# EAGLE board STorM32 NT imu v10-mpu9250 (EAGLE 6.5.0)
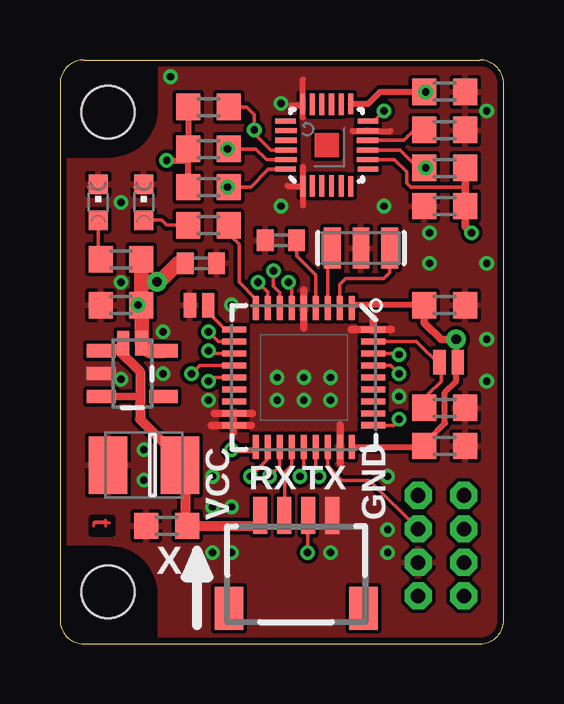
[diagram p0: board, top side]
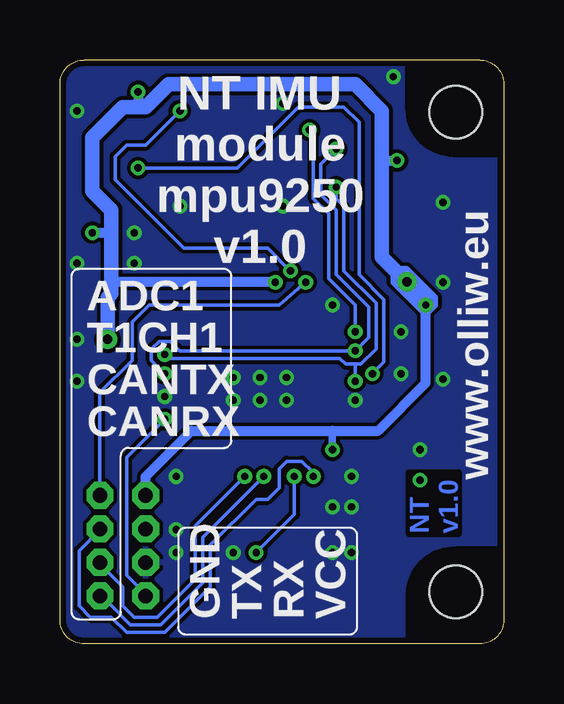
[diagram p1: board, bottom side, seen from below]

Size 18.49 x 24.35 mm. Coordinates in mm from the lower left corner, seen from the top.
Outline: 1,24.35 17.49,24.35 arc-90 18.49,23.35 18.49,1 arc-90 17.49,0 1,0 arc-90 0,1 0,23.35 arc-90 1,24.35
Copper layers (1*16): Top 0.035mm / dielectric 1.5mm / Bottom 0.035mm
Design rules "Fusion_eagle_rule_v1.1-shapes-supply-changed": minimum track width 6mil, minimum drill 12mil, track to track 6mil, track to pad 6mil, pad to pad 6mil, via to via 6mil, smd to smd 0mil, copper to edge 10mil, drill to drill 10mil, minimum pad ring 10mil, minimum via ring 6mil, stop-mask expansion 2mil, vias tented up to drill 100mil, thermal gap 6mil
Holes 2.2 mm at 2,2.17 2,22.18

## Footprints (pad centres in the part's own frame; a part is rotated, then mirrored left to right if it is on the bottom)
SMC_B = smd 1.6 x 2.4: + -1.5,0; - 1.5,0
C0603 = smd 1 x 1.1: 1 -0.85,0; 2 0.85,0
C0402 = smd 0.7 x 0.9: 1 -0.65,0; 2 0.65,0
QFN-24-3X3 = smd 0.85 x 0.21: 1 -1.725,1; 6 -1.725,-1; 13 1.725,-1; 18 1.725,1 | smd 0.9 x 0.21: 2 -1.7,0.6; 3 -1.7,0.2; 5 -1.7,-0.6; 14 1.7,-0.6; 15 1.7,-0.2; 16 1.7,0.2; 17 1.7,0.6 | smd 0.9 x 0.2: 4 -1.7,-0.2 | smd 0.21 x 0.85: 7 -1,-1.725; 12 1,-1.725; 19 1,1.725; 24 -1,1.725 | smd 0.21 x 0.9: 8 -0.6,-1.7; 9 -0.2,-1.7; 10 0.2,-1.7; 11 0.6,-1.7; 20 0.6,1.7; 21 0.2,1.7; 22 -0.2,1.7; 23 -0.6,1.7
SOT23-5 = smd 0.55 x 1.2: 1 -0.95,-1.3; 2 0,-1.3; 3 0.95,-1.3; 4 0.95,1.3; 5 -0.95,1.3
4X1_1P27_OCT_BILEX = drill 0.61 pad 1.118 octagon: 1 0,0; 2 0,-1.397; 3 0,-2.794; 4 0,-4.191
CHIPLED_0603 = smd 0.8 x 0.8: A 0,-0.75; C 0,0.75
SM04B-SRSS-TB = smd 0.6 x 1.55: 1 -1.5,2.975; 2 -0.5,2.975; 3 0.5,2.975; 4 1.5,2.975 | smd 1.2 x 1.8: FIT@1 -2.8,-0.9; FIT@2 2.8,-0.9
R0603 = smd 1 x 1.1: 1 -0.85,0; 2 0.85,0
SJ_2S-NO = smd 0.508 x 1.016: 1 -0.381,0; 2 0.381,0
VFQFPN36 = smd 1 x 0.25: 1 -2.9,2; 2 -2.9,1.5; 3 -2.9,1; 4 -2.9,0.5; 5 -2.9,0; 6 -2.9,-0.5; 7 -2.9,-1; 8 -2.9,-1.5; 9 -2.9,-2; 19 2.9,-2; 20 2.9,-1.5; 21 2.9,-1; 22 2.9,-0.5; 23 2.9,0; 24 2.9,0.5; 25 2.9,1; 26 2.9,1.5; 27 2.9,2 | smd 0.25 x 1: 10 -2,-2.9; 11 -1.5,-2.9; 12 -1,-2.9; 13 -0.5,-2.9; 14 0,-2.9; 15 0.5,-2.9; 16 1,-2.9; 17 1.5,-2.9; 18 2,-2.9; 29 1.5,2.9; 30 1,2.9; 31 0.5,2.9; 32 0,2.9; 33 -0.5,2.9; 34 -1,2.9; 35 -1.5,2.9; 36 -2,2.9 | smd 0.27 x 1: 28 2,2.9
RESONATOR-SMD = smd 0.7 x 1.7: 1 -1.2,0; 2 0,0; 3 1.2,0

## Placement (x,y rotation side)
C1  10u/6.3V  [SMC_B]  3.49,7.46 180 top
C2  100n  [C0603]  4.45,4.92 180 top
C3  100n  [C0603]  16.03,23.02 0 top
C4  10n  [C0603]  16.03,18.26 180 top
C6  100n  [C0603]  16.03,21.43 0 top
C7  1u  [C0603]  2.54,14.13 180 top
C8  100n  [C0402]  9.21,16.83 180 top
C9  100n  [C0603]  16.03,8.26 0 top
C10  100n  [C0402]  5.87,15.88 0 top
C11  100n  [C0603]  16.03,14.13 0 top
IC1  MPU9250  [QFN-24-3X3]  11.11,20.8 90 top
IC2  [SOT23-5]  3.02,11.27 270 top
JP1  EXT  [4X1_1P27_OCT_BILEX]  16.83,6.19 0 top
JP2  SWD  [4X1_1P27_OCT_BILEX]  14.92,6.19 0 top
LED1  red  [CHIPLED_0603]  1.59,18.41 0 top
LED2  green  [CHIPLED_0603]  3.49,18.41 0 top
NTX  NTX  [SM04B-SRSS-TB]  9.84,2.38 0 top
R1  2.2k  [R0603]  2.54,16.03 180 top
R2  2.2k  [R0603]  6.19,20.64 180 top
R3  2.2k  [R0603]  6.19,19.05 180 top
R4  10k  [R0603]  16.03,19.84 0 top
R5  10k  [R0603]  6.19,22.38 180 top
R6  2.2k  [R0603]  6.19,17.46 180 top
R7  10k  [R0603]  16.03,9.84 180 top
SJ1  POWER  [SJ_2S-NO]  3.02,12.54 0 top
SJ2  BOOT0  [SJ_2S-NO]  16.19,11.75 180 top
SJ3  IMU-ID  [SJ_2S-NO]  5.79,14.13 0 top
U1  STM32F10XTXU6  [VFQFPN36]  10.16,11.11 270 top
Y1  RESONATORSMD  [RESONATOR-SMD]  12.54,16.51 180 top

## Library data of the parts
C1-C4 C6-C11 R1-R7 = rcl
IC1 IC2 SJ1-SJ3 Y1 = # SparkFun2
JP1 JP2 = # stdlib
LED1 LED2 = led
NTX = con-jst2
U1 = # stm32

## Nets
3.3V: C3.1 C4.1 C7.1 C9.1 C10.1 C11.1 IC1.8 IC1.13 IC2.5 JP2.1 R1.1 R2.2 R3.2 R4.2 R5.2 SJ1.2 SJ2.1 U1.1 U1.6 U1.19 U1.27
5V: C1.+ C2.1 IC2.1 IC2.3 NTX.1 SJ1.1
ADC1: JP1.1 U1.8
CANRX: JP1.4 U1.23
CANTX: JP1.3 U1.24
CS: IC1.22 R5.1 U1.11
GND: C1.- C2.2 C3.2 C4.2 C6.2 C7.2 C8.2 C9.2 C10.2 C11.2 IC1.1 IC1.11 IC1.18 IC2.2 JP2.3 LED1.C LED2.C NTX.4 R7.1 SJ3.1 U1.5 U1.17 U1.18 U1.26 U1.36 Y1.2
INT: IC1.12 U1.7
LED: R6.1 U1.9
N$1: C8.1 U1.4
N$2: LED2.A R6.2
N$3: R7.2 SJ2.2 U1.35
N$4: SJ3.2 U1.10
N$5: U1.2 Y1.1
N$6: U1.3 Y1.3
N$9: LED1.A R1.2
N$20: C6.1 IC1.10
RX: NTX.2 U1.22
SCL: IC1.23 R2.1 U1.12 U1.33
SDA: IC1.24 R3.1 U1.14 U1.34
SDO: IC1.9 R4.1 U1.13
SWCLK: JP2.4 U1.28
SWDIO: JP2.2 U1.25
T1CH1: JP1.2 U1.20
TX: NTX.3 U1.21

## Tracks (layer width: path | path; a pad name or v marks a point on that pad's centre or on a via)
3.3V  (via drill 0.3, 0.4 pad 0.81)
  Top 0.152: 12.2,14.13 U1.1 | 15.34,8.21 C9.1 | 16.88,19.05 14.61,19.05 14.45,19.21 14.45,19.68 13.94,20.2 IC1.8 | 3.4,14.44 C7.1 | 16.51,11.34 SJ2.1 16.51,12 | 8.04,8.1 U1.19 | U1.6 9.66,14.95 v9.53,15.08 | 3.4,15.1 3.39,15.24 | C3.1 v15.24,23.02
  Top 0.254: C11.1 12.2,14.13 | U1.27 15.34,8.21 15.34,8.52 16.03,9.21 16.03,10.48 16.51,10.95 16.51,11.34 16.51,12 v16.51,12.7 | R5.2 R2.2 5.34,20.16 | C3.1 13.34,23.02 12.84,22.52 IC1.13 | R3.2 5.34,20.16 | v7.14,8.1 8.04,8.1 | v4.45,20.16 5.34,20.16
  Top 0.305: C11.1 15.18,13.39 15.88,12.7 v16.51,12.7 | R4.2 16.88,19.05 C4.1 16.88,17.41 v17.14,17.14
  Top 0.406: C7.1 v3.25,14.13
  Top 0.61: 3.4,14.44 SJ1.2 3.72,12.22 IC2.5 | C7.1 3.39,15.24 R1.1 | 3.4,15.1 v4.04,15.1 4.13,15.08 4.94,15.89 C10.1
  Bottom 0.152: 16.19,15.08 16.35,14.92
  Bottom 0.254: 4.6,15.08 3.33,13.81 3.17,13.81 2.86,14.13 2.86,14.45 4.05,15.64 4.6,15.64 4.6,15.08 | 4.6,15.08 4.52,15.16 4.1,15.16 v4.04,15.1 v4.04,15.09 | 2.94,14.29 3.02,14.29 3.89,15.16 3.97,15.16 v4.04,15.09 | v4.04,15.09 4.21,14.92 3.17,13.89 3.17,14.29 3.25,14.37
  Bottom 0.305: v7.14,8.1 7.14,8.89
  Bottom 0.406: v4.04,15.1 3.25,14.31 3.25,10.87 5.24,8.89 7.14,8.89 13.02,8.89 14.92,6.99 JP2.1 | v9.53,15.08 16.19,15.08 | 5.08,20.16 v4.45,20.16 | v15.24,23.02 15.24,22.38 | v17.14,17.14 16.35,17.14
  Bottom 0.61: v4.04,15.1 5.08,16.14 5.08,20.16 5.08,22.23 6.19,23.34 13.97,23.34 14.92,22.38 15.24,22.38 15.88,22.38 17.14,21.11 17.14,18.89 16.35,18.1 16.35,17.14 16.35,14.92 16.35,14.61 16.51,14.45 v16.51,12.7
  pour Bottom (isolate 0.254, rank 2): 1.11,13.18 1.11,12.38 1.75,12.38 1.75,13.18
5V
  Top 0.152: C2.1 5.24,4.76 | 5.24,7.85 C1.+ 4.92,7.37 4.92,7.78 | 3.33,10.32 3.33,10 | 2.38,12.3 2.54,12.45 SJ1.1 | 8.26,4.92 8.41,4.92 | 8.26,5.11 NTX.1
  Top 0.305: IC2.3 3.33,10.32 | 8.41,4.92 8.26,5.11
  Top 0.406: 5.24,4.76 5.24,7.85 | IC2.1 2.38,12.3 3.33,11.35 3.33,10 3.33,9.37 4.92,7.78 | C2.1 8.26,4.92
ADC1  (via drill 0.3)
  Top 0.152: U1.8 8.66,14.68 v8.26,15.08
  Bottom 0.152: v8.26,15.08 9.37,14.13 14.76,14.13 15.48,13.41 15.48,11.83 16.83,10.48 JP1.1
CANRX  (via drill 0.3)
  Top 0.152: v10,6.99 10.16,7.14 U1.23
  Bottom 0.152: v10,6.99 12.54,4.45 12.54,2.54 14.29,0.79 15.56,0.79 16.51,1.75 16.73,1.75 JP1.4
CANTX  (via drill 0.3)
  Top 0.152: U1.24 10.66,7.12 v10.79,6.99
  Bottom 0.152: v10.79,6.99 12.86,4.92 12.86,2.7 14.45,1.11 15.4,1.11 15.88,1.59 15.88,2.38 16.73,3.24 JP1.3
CS  (via drill 0.3)
  Top 0.152: U1.11 6.6,12.61 v6.19,13.02 | 6.99,22.28 R5.1 7.78,22.38 8.1,22.07 v8.1,21.43 8.1,21.27 8.77,20.6 IC1.22
  Bottom 0.152: v6.19,13.02 6.19,14.13 7.3,15.24 7.3,17.94 7.94,18.57 7.94,21.27 v8.1,21.43
GND  (via drill 0.3 pad 0.61)
  Top 0.152: U1.17 7.26,9.48 7.22,9.45
  Top 0.254: 10.12,19.88 10.12,19.09 | 10.12,19.09 10.12,18.3 | 12.18,21.39 13.77,21.39 | 10.12,21.95 10.12,23.54 | 9.48,19.09 10.12,19.09 | 9.64,22.46 10.08,22.46
  Top 0.305: 10.16,14.76 10.16,13.18 | 13.81,13.11 12.14,13.11 | 6.43,9.6 8.02,9.6 | 6.31,9.12 7.98,9.12 | 11.67,9.13 11.67,7.54 | 13.06,13.18 13.06,13.61 | 7.22,8.81 7.22,9.45
  other vias: 2.54,15.08 9.05,11.11 11.27,11.11 10.16,11.11 9.05,10.16 10.16,10.16 11.27,10.16 7.14,14.13 9.21,18.26 13.49,18.26 13.65,6.99 6.35,6.99 3.49,8.1 3.49,6.83 2.54,18.41 13.65,3.81 14.13,10.32 11.27,3.81 7.14,3.81 6.35,3.81 4.29,11.27 15.4,15.88 17.78,15.88 15.4,17.14 7.14,5.71 6.35,5.71 6.19,10.16 13.65,4.76 17.78,12.7 17.78,10.95 4.29,13.02 2.54,11.03 17.78,22.23 9.21,22.54 4.6,23.65
  pour Bottom (isolate 0.152): 0.33,23.35 arc-90 1,24.02 17.49,24.02 arc-90 18.16,23.35 18.16,1 arc-90 17.49,0.33 1,0.33 arc-90 0.33,1
  pour Top (isolate 0.152): 0.33,23.35 arc-90 1,24.02 17.49,24.02 arc-90 18.16,23.35 18.16,1 arc-90 17.49,0.33 1,0.33 arc-90 0.33,1
  cutout Bottom: 0.27,20.31 2.12,20.31 arc90 4.08,22.37 4.08,24.12 1.02,24.12 arc90 0.27,23.37
  cutout Top: 0.27,20.31 2.12,20.31 arc90 4.08,22.37 4.08,24.12 1.02,24.12 arc90 0.27,23.37
  cutout Bottom: 4.06,0.25 4.06,2.1 arc90 2,4.06 0.25,4.06 0.25,1 arc90 1,0.25
  cutout Top: 4.06,0.25 4.06,2.1 arc90 2,4.06 0.25,4.06 0.25,1 arc90 1,0.25
  pour Top (no thermals): 10.95,6.35 11.91,6.35 11.91,4.13 10.95,4.13
  pour Top (no thermals): 0.95,11.75 2.54,11.75 2.54,10.87 0.95,10.87
INT  (via drill 0.3)
  Top 0.152: U1.7 9.16,14.65 8.89,14.92 v8.89,15.56 | IC1.12 13.06,21.8 v13.49,22.23
  Bottom 0.152: v8.89,15.56 9.84,16.51 13.34,16.51 16.19,19.37 16.19,20.32 15.72,20.8 14.92,20.8 v13.49,22.23
LED
  Top 0.152: U1.9 8.16,14.38 7.46,15.08 7.46,16.67 7.14,16.99 7.14,17.36 R6.1
N$1
  Top 0.152: U1.4 10.66,15.38 9.86,16.18 C8.1
N$2
  Top 0.152: 3.54,17.94 LED2.A 4.24,17.66 4.45,17.46 R6.2
N$3
  Top 0.152: U1.35 14.85,12.61 15.88,11.59 | 15.88,11.59 SJ2.2 | R7.2 15.34,10.42 15.88,10.95 15.88,11.59
N$4
  Top 0.152: U1.10 6.89,13.11 6.1,13.91 SJ3.2
N$5
  Top 0.152: U1.2 11.66,14.99 11.91,15.24 13.49,15.24 13.74,15.49 Y1.1
N$6
  Top 0.152: U1.3 11.16,15.99 11.34,16.28 Y1.3
N$9
  Top 0.152: LED1.A 1.59,16.3 R1.2
N$20
  Top 0.152: C6.1 14.76,21.43 14.33,21 IC1.10
RX
  Top 0.152: U1.22 9.66,7.44 9.37,7.14 9.37,5.22 NTX.2
SCL  (via drill 0.3)
  Top 0.152: U1.33 13.79,11.61 v14.13,11.27 | U1.12 6.3,12.11 v6.19,12.22 | v6.99,20.64 R2.1 8.17,20.64 8.61,20.2 IC1.23
  Bottom 0.152: v14.13,11.27 14.68,11.83 14.68,12.3 14.37,12.62 13.89,12.62 13.49,12.22 v6.19,12.22 5.64,12.78 5.64,14.05 6.99,15.4 6.99,18.1 7.62,18.73 7.62,20 v6.99,20.64
SDA  (via drill 0.3)
  Top 0.152: U1.34 14.08,12.11 v14.13,12.06 | U1.14 6.35,11.11 v6.19,10.95 | v6.99,19.05 R3.1 7.94,19.05 8.68,19.8 IC1.24
  Bottom 0.152: v14.13,12.06 13.97,11.91 6.83,11.91 6.59,11.67 6.19,11.67 | 6.19,11.67 5.95,11.67 5.32,12.3 5.32,14.21 6.67,15.56 6.67,18.26 6.99,18.57 v6.99,19.05 | v6.19,10.95 6.19,11.67
SDO  (via drill 0.3)
  Top 0.152: U1.13 5.82,11.61 v5.48,11.27 | v15.24,19.84 15.24,19.9 R4.1 14.92,19.84 14.17,20.6 IC1.9
  Bottom 0.152: v5.48,11.27 5,11.75 5,14.37 6.03,15.4 6.03,21.75 6.67,22.38 8.57,22.38 11.11,19.84 v15.24,19.84
SWCLK  (via drill 0.3)
  Top 0.152: U1.28 13.91,9.11 v14.13,9.37
  Bottom 0.152: JP2.4 14.92,2.06 15.72,2.86 15.72,7.78 v14.13,9.37
SWDIO
  Top 0.152: U1.25 11.16,7.41 11.75,6.83 12.89,6.83 JP2.2
T1CH1  (via drill 0.3)
  Top 0.152: v7.94,6.99 8.66,7.71 U1.20
  Bottom 0.152: JP1.2 16.83,4.76 17.7,3.89 17.7,1.59 17.22,1.11 16.35,1.11 15.72,0.48 14.13,0.48 12.22,2.38 12.22,4.13 10.32,6.03 9.84,6.03 9.37,6.51 9.37,7.3 9.05,7.62 8.41,7.62 7.94,7.14 v7.94,6.99
TX  (via drill 0.3)
  Top 0.152: U1.21 9.16,7.41 v8.73,6.99 | v10.32,3.81 10.32,5.17 NTX.3
  Bottom 0.152: v8.73,6.99 8.73,5.4 v10.32,3.81

## Text on the board
Top: t
Bottom: NT / v1.0
tNames: RX | TX | VCC | GND | X
bNames: www.olliw.eu | NT IMU / module / mpu9250 / v1.0 | ADC1 | T1CH1 | CANTX | CANRX | VCC | RX | TX | GND